# Altium PCB SOIC16.PcbDoc
Units mil, origin at the board's own origin, x right, y up, seen from the top; angles counter-clockwise.
Board outline 840 x 540 mil, 2 copper layers (Top Layer, Bottom Layer); 3 components, 142 nets, 32 pads, 4 vias.
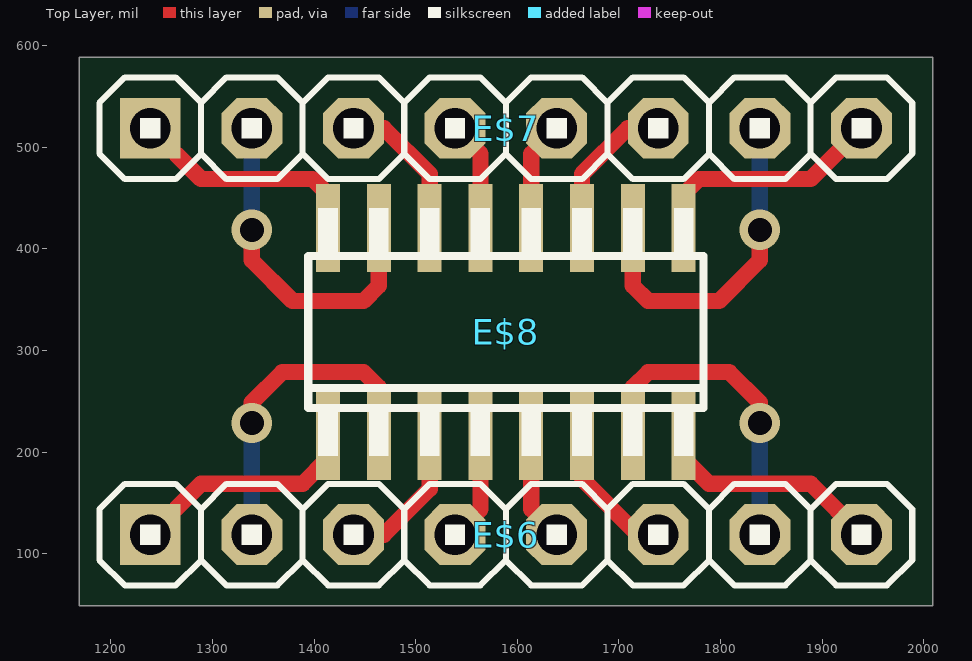
[diagram p0: Top Layer view]
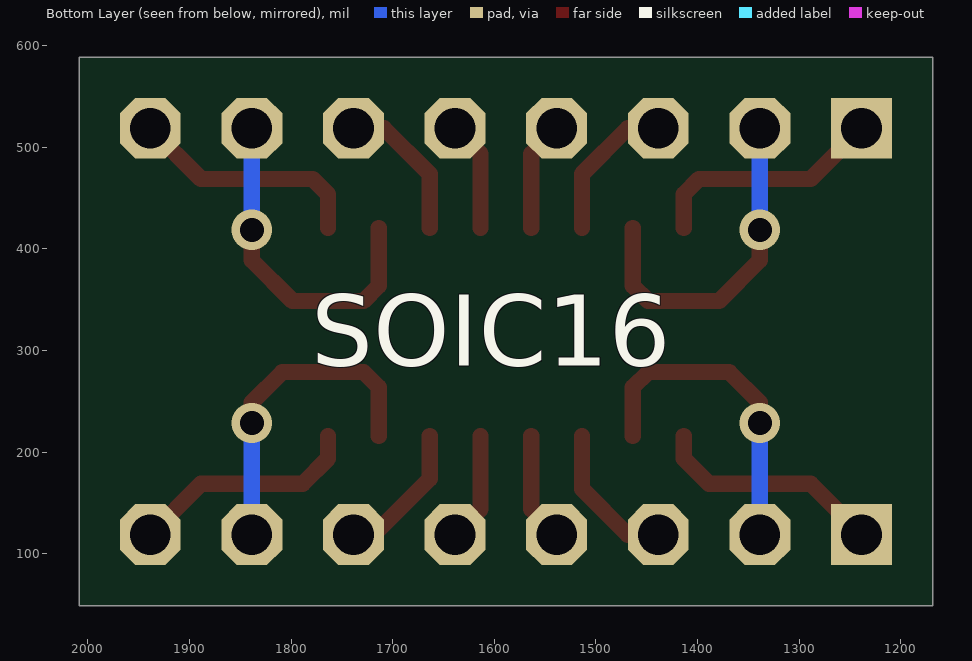
[diagram p1: Bottom Layer view, seen from below]

## Layer stack, top to bottom
Top Layer: signal copper 1.4
Dielectric: dielectric 12.6, FR-4, Dk 4.8
Bottom Layer: signal copper 1.4

## Board outline
1168.67,588.67 2008.67,588.67 2008.67,48.67 1168.67,48.67

## Design rules (kind name [scope] priority, off if disabled: settings)
Clearance [All] p1: gap=10
PolygonConnect [All] p1: connectstyle=Relief reliefconductorwidth=10 reliefentries=4 polygonreliefangle="90 Angle"
RoutingVias [All] p1: holewidth=28 width=50 viastyle="Through Hole" minholewidth=28 minwidth=50 maxholewidth=28 maxwidth=50
SilkscreenOverComponentPads [All] p1: minsilkscreentomaskgap=10
SolderMaskExpansion [All] p1: expansion=4
Width [All] p1: maxlimit=10 minlimit=10 preferedwidth=10
27 further rules are at their usual default settings.

## Components (designator, comment, footprint, x,y, rotation, side; value= is the part's Value field where it differs from the comment)
E$6 "Comment" 1X08-S 1588.67,118.67 r0 top
E$7 "Comment" 1X08-S 1588.67,518.67 r0 top
E$8 "Comment" SO-16 1588.67,330.67 r0 top

## Footprints (in the part's own frame and the unit in brackets; to place one, negate y for a bottom-side part, rotate by r counter-clockwise, add the part's x,y. Pads: shape width x height; smd on the part's side, far side on the other; paste and mask are expansions set on the pad)
1X08-S [mil]
  rect 60x60 hole 40: 1(-350,0)
  oct 60x60 hole 40: 2(-250,0) 3(-150,0) 4(-50,0) 5(50,0) 6(150,0) 7(250,0) 8(350,0)
  silkscreen extent -400,-50 400,50
SO-16 [mm]
  rect 0.6x2.2 smd: 1(-4.445,-2.918) 2(-3.175,-2.918) 3(-1.905,-2.918) 4(-0.635,-2.918) 5(0.635,-2.918) 6(1.905,-2.918) 7(3.175,-2.918) 8(4.445,-2.918) 9(4.445,2.282) 10(3.175,2.282) 11(1.905,2.282) 12(0.635,2.282) 13(-0.635,2.282) 14(-1.905,2.282) 15(-3.175,2.282) 16(-4.445,2.282)
  silkscreen extent -4.94,-3.42 4.94,2.78

## Via types
v1: diameter 39.62, hole 23.62, Top Layer to Bottom Layer, 4 vias

## Nets (pads, with @x,y where several pads share a name; then routed paths per layer and width w, separated by ;. In a path a pad name is that pad's centre, name@x,y a point inside that pad or via, vN(x,y) a via of type N, cw(c..) or ccw(c..) an arc to the next point about the centre after c; other vN are vias at no path point)
N$1: 
N$2: 
N$3: 
N$4: 
N$5: 
N$6: 
N$7: 
N$8: 
N$9: 
N$10: 
N$11: 
N$12: 
N$13: 
N$14: 
N$15: 
N$16: 
N$17: 
N$18: 
N$19: 
N$20: 
N$21: 
N$22: 
N$23: 
N$24: 
N$25: 
N$26: 
N$27: 
N$28: 
N$29: 
N$30: 
N$31: 
N$32: 
N$33: 
N$34: 
N$35: 
N$36: 
N$37: 
N$38: 
N$39: 
N$40: 
N$41: 
N$42: 
N$43: 
N$44: 
S$1: 
S$2: 
S$3: 
S$4: 
S$5: 
S$6: 
S$7: 
S$8: 
S$9: 
S$10: 
S$11: 
S$12: 
S$13: 
S$14: 
S$15: 
S$16: 
S$17: 
S$18: 
S$19: 
S$20: 
S$21: 
S$22: 
S$23: 
S$24: 
S$25: 
S$26: 
S$27: 
S$28: 
S$29: 
S$30: 
S$31: 
S$32: 
S$33: E$6.1 E$8.1 | length 228.2
  Top Layer w16: E$6.1 1288.67,168.67 1388.67,168.67 1413.67,193.67 E$8.1
S$34: E$6.2 E$8.2 | length 321.5
  Top Layer w16: v1(1338.67,228.67) 1338.67,248.67 1368.67,278.67 1448.67,278.67 1463.67,263.67 E$8.2
  Bottom Layer w16: E$6.2 v1(1338.67,228.67)
S$35: E$6.3 E$8.3 | length 145.8
  Top Layer w16: E$6.3 1468.67,118.67 1513.67,163.67 E$8.3
S$36: E$6.4 E$8.4 | length 107.5
  Top Layer w16: E$6.4 1563.67,143.67 E$8.4
S$37: E$6.5 E$8.5 | length 107.5
  Top Layer w16: E$8.5 1613.67,143.67 E$6.5
S$38: E$6.6 E$8.6 | length 139.9
  Top Layer w16: E$8.6 1663.67,173.67 1718.67,118.67 E$6.6
S$39: E$6.7 E$8.7 | length 321.5
  Top Layer w16: E$8.7 1713.67,263.67 1728.67,278.67 1808.67,278.67 1838.67,248.67 v1(1838.67,228.67)
  Bottom Layer w16: E$6.7 v1(1838.67,228.67)
S$40: E$6.8 E$8.8 | length 228.2
  Top Layer w16: E$8.8 1763.67,193.67 1788.67,168.67 1888.67,168.67 E$6.8
S$41: E$7.1 E$8.16 | length 235.1
  Top Layer w16: E$7.1 1288.67,468.67 1398.67,468.67 1413.67,453.67 E$8.16
S$42: E$7.2 E$8.15 | length 334.6
  Top Layer w16: v1(1338.67,418.67) 1338.67,388.67 1378.67,348.67 1448.67,348.67 1463.67,363.67 E$8.15
  Bottom Layer w16: v1(1338.67,418.67) E$7.2
S$43: E$7.3 E$8.14 | length 146.8
  Top Layer w16: E$7.3 1468.67,518.67 1513.67,473.67 E$8.14
S$44: E$7.4 E$8.13 | length 108.5
  Top Layer w16: E$7.4 1563.67,493.67 E$8.13
S$45: E$7.5 E$8.12 | length 108.5
  Top Layer w16: E$8.12 1613.67,493.67 E$7.5
S$46: E$7.6 E$8.11 | length 146.8
  Top Layer w16: E$8.11 1663.67,473.67 1708.67,518.67 E$7.6
S$47: E$7.7 E$8.10 | length 334.6
  Top Layer w16: E$8.10 1713.67,363.67 1728.67,348.67 1798.67,348.67 1838.67,388.67 v1(1838.67,418.67)
  Bottom Layer w16: v1(1838.67,418.67) E$7.7
S$48: E$7.8 E$8.9 | length 235.1
  Top Layer w16: E$8.9 1763.67,453.67 1778.67,468.67 1888.67,468.67 E$7.8
S$49: 
S$50: 
S$51: 
S$52: 
S$53: 
S$54: 
S$55: 
S$56: 
S$57: 
S$58: 
S$59: 
S$60: 
S$61: 
S$62: 
S$63: 
S$64: 
S$65: 
S$66: 
S$67: 
S$68: 
S$69: 
S$70: 
S$71: 
S$72: 
S$73: 
S$74: 
S$75: 
S$76: 
S$77: 
S$78: 
S$79: 
S$80: 
S$81: 
S$82: 
S$83: 
S$84: 
S$85: 
S$86: 
S$87: 
S$88: 
S$89: 
S$90: 
S$91: 
S$92: 
S$93: 
S$94: 
S$95: 
S$96: 
S$97: 
S$98: 

## Silkscreen, mask and mechanical layers (free items; w line width, h text height)
Bottom Overlay:
  text "SOIC16" at 1780,285 h70